# EAGLE board Multimeter - Ultimate (EAGLE 6.1)
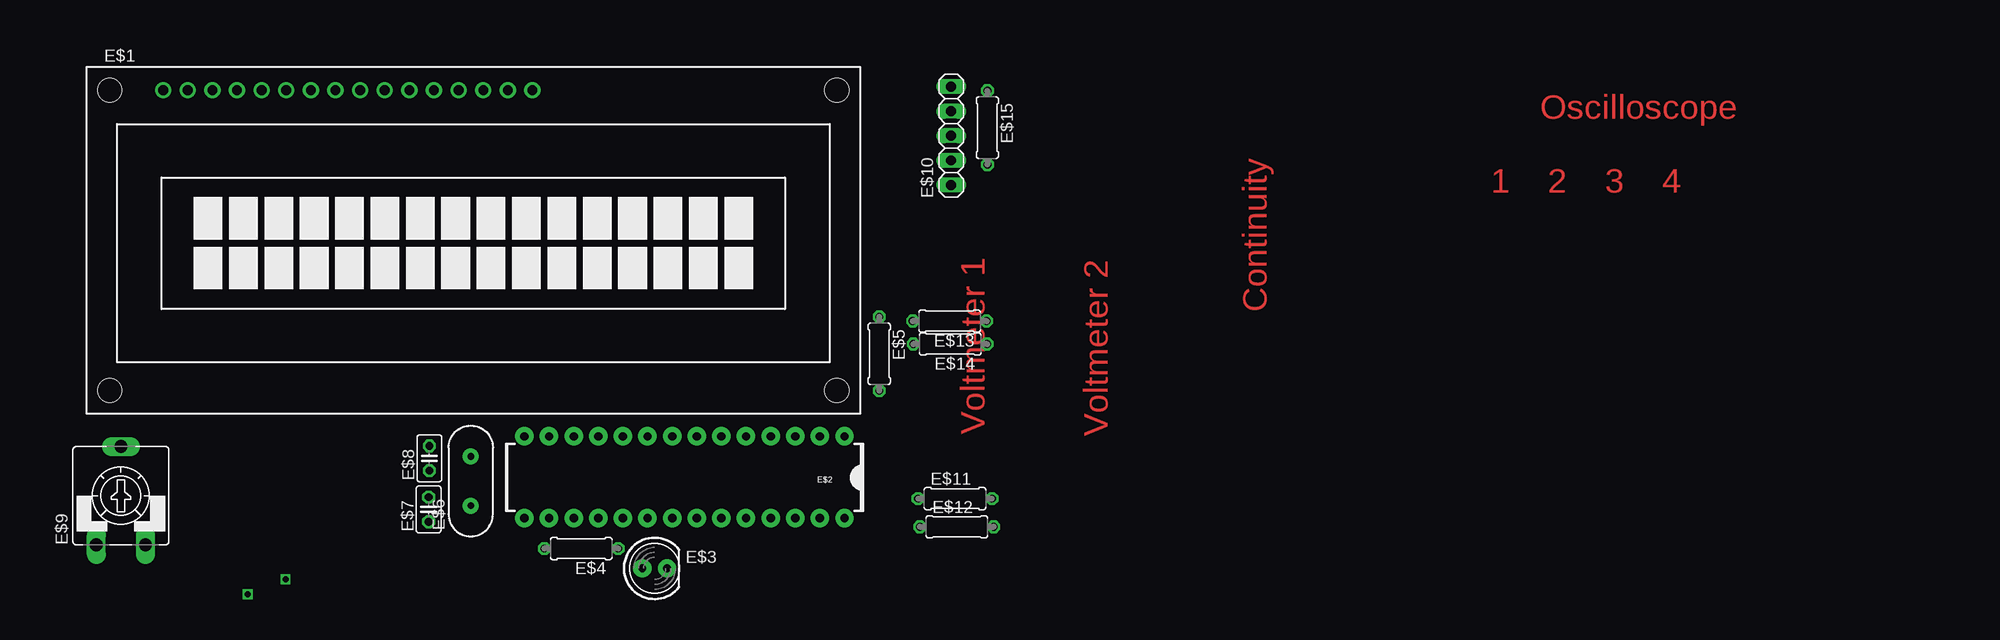
[diagram p0: board, top side]
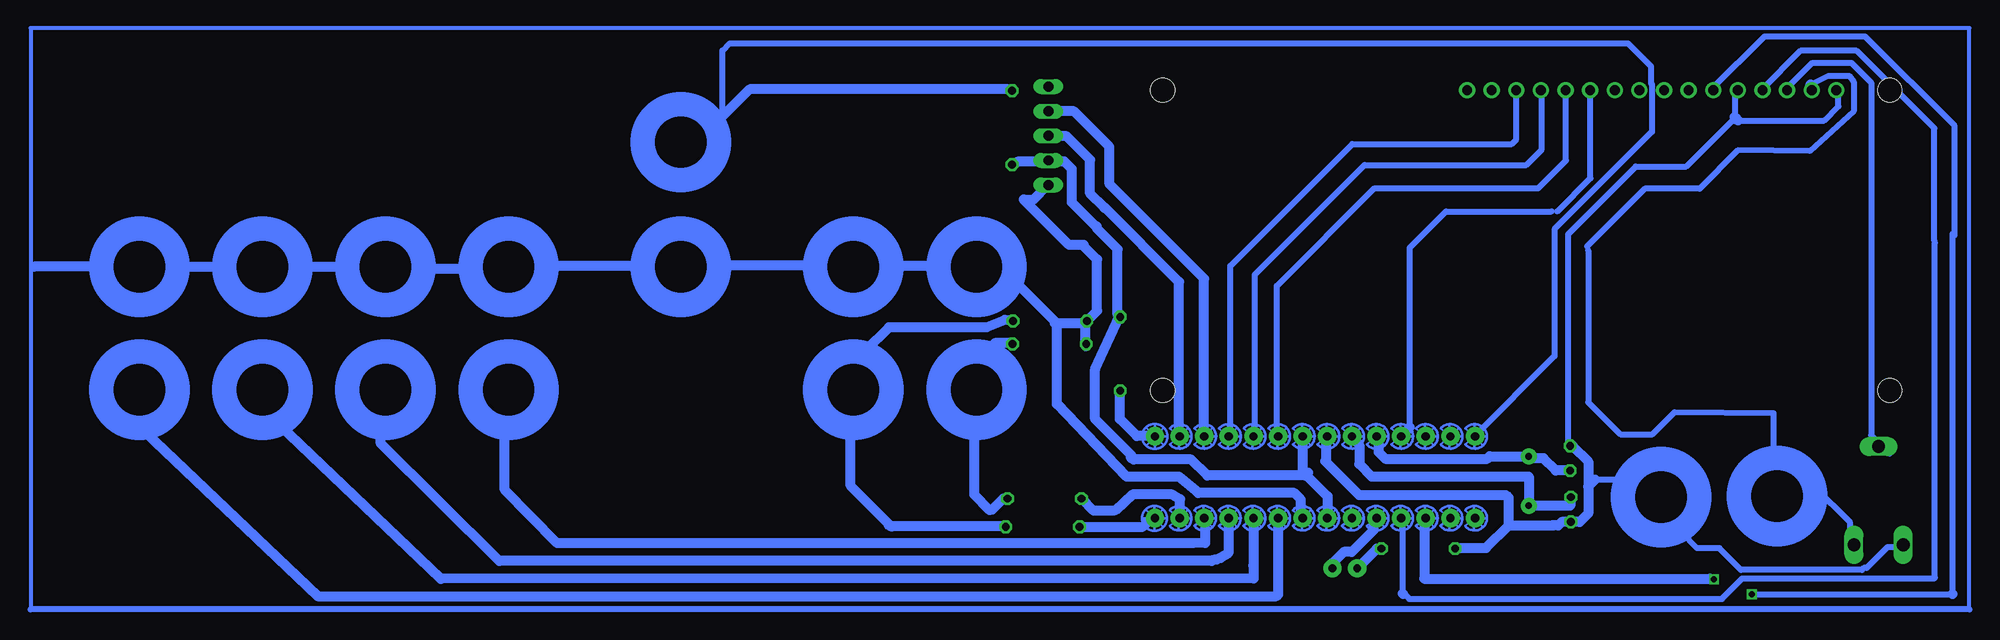
[diagram p1: board, bottom side, seen from below]

No outline drawn. Coordinates in mm, seen from the top.
Copper layers (1*16): Top 0.035mm / dielectric 1.5mm / Bottom 0.035mm
Design rules: minimum track width 10mil, minimum drill 24mil, track to track 8mil, track to pad 8mil, pad to pad 8mil, via to via 8mil, smd to smd 8mil, copper to edge 40mil, drill to drill 8mil, minimum pad ring 10mil, minimum via ring 8mil, stop-mask expansion 4mil, vias tented up to drill 0mil, thermal gap 10mil

## Footprints (pad centres in the part's own frame; a part is rotated, then mirrored left to right if it is on the bottom)
TUXGR_16X2_R2 = drill 1 pad 1.676: 1 -32,15.5; 2 -29.46,15.5; 3 -26.92,15.5; 4 -24.38,15.5; 5 -21.84,15.5; 6 -19.3,15.5; 7 -16.76,15.5; 8 -14.22,15.5; 9 -11.68,15.5; 10 -9.14,15.5; 11 -6.6,15.5; 12 -4.06,15.5; 13 -1.52,15.5; 14 1.02,15.5; 15 3.56,15.5; 16 6.1,15.5 | hole 2.5: -37.5,-15.5; 37.5,-15.5; -37.5,15.5; 37.5,15.5
DIL28-3-SIMON-KIT = drill 0.864 pad 1.905: 1 -16.51,-4.255; 2 -13.97,-4.255; 3 -11.43,-4.255; 4 -8.89,-4.255; 5 -6.35,-4.255; 6 -3.81,-4.255; 7 -1.27,-4.255; 8 1.27,-4.255; 9 3.81,-4.255; 10 6.35,-4.255; 11 8.89,-4.255; 12 11.43,-4.255; 13 13.97,-4.255; 14 16.51,-4.255; 15 16.51,4.191; 16 13.97,4.191; 17 11.43,4.191; 18 8.89,4.191; 19 6.35,4.191; 20 3.81,4.191; 21 1.27,4.191; 22 -1.27,4.191; 23 -3.81,4.191; 24 -6.35,4.191; 25 -8.89,4.191; 26 -11.43,4.191; 27 -13.97,4.191; 28 -16.51,4.191
LED5MM-KIT = drill 0.813 pad 1.88: A -1.27,0; K 1.27,0
0207/7 = drill 0.813 octagon: 1 -3.81,0; 2 3.81,0
HC49US = drill 0.7 pad 1.651: 1 -2.54,0; 2 2.54,0
C025-025X050 = drill 0.813 octagon: 1 -1.27,0; 2 1.27,0
CA9V = drill 1.321 long: A -2.54,-5.08; E 2.54,-5.08; S 0,5.08
1X05 = drill 1.016 long: 1 -5.08,0; 2 -2.54,0; 3 0,0; 4 2.54,0; 5 5.08,0

## Placement (x,y rotation side)
E$1  [TUXGR_16X2_R2]  45.72,38.1 0 top
E$2  [DIL28-3-SIMON-KIT]  67.5,13.61 180 top
E$3  [LED5MM-KIT]  64.43,4.25 0 top
E$4  [0207/7]  56.85,6.29 180 top
E$5  [0207/7]  87.59,26.39 270 top
E$6  [HC49US]  45.45,13.26 90 top
E$7  [C025-025X050]  41.1,10.33 90 top
E$8  [C025-025X050]  41.18,15.6 90 top
E$9  [CA9V]  9.36,11.75 0 top
E$10  [1X05]  95.01,48.89 90 top
E$11  [0207/7]  95.41,11.45 0 top
E$12  [0207/7]  95.59,8.53 0 top
E$13  [0207/7]  94.85,29.77 180 top
E$14  [0207/7]  94.91,27.4 180 top
E$15  [0207/7]  98.74,49.73 270 top

## Library data of the parts
E$1 = display-lcd
E$2 = SparkFun-DigitalIC
E$3 = SparkFun-LED
E$4 E$5 E$7 E$8 E$11-E$15 = rcl
E$6 = SparkFun-FreqCtrl
E$9 = pot
E$10 = pinhead

## Tracks (layer width: path | path; a pad name or v marks a point on that pad's centre or on a via)
S$1
  Bottom 0.406: 0,0 0,60
  Bottom 0.61: 0,0 200,0
S$2
  Bottom 0.406: 0,60 200,60 200,0
S$3
  Bottom 1.016: 101.05,10.25 102.64,11.84 102.64,17.99
S$4
  Bottom 1.016: 115.21,18.57 115.21,19.34
S$5
  Bottom 1.016: 78.85,8.35 78.85,6.86 80.07,6.84 145.67,6.84 151.08,12.35 151.08,18.53
S$6
  Bottom 1.016: 76.4,9.45 76.44,9.41 76.44,5.81 77.24,5.32 77.66,5.16 78.17,5.01 151.66,5.01 163.88,17.13 163.88,18.05
S$7
  Bottom 1.016: 73.93,9.61 73.85,9.53 73.85,4.53 73.84,3.2 157.66,3.15 174.39,19.15 175.14,19.15
S$8
  Bottom 1.016: 188.27,18.39 170.4,1.38 71.5,1.38 71.29,1.52 71.29,9.34
S$9
  Bottom 1.016: 111.17,8.53 115.4,12.76 115.4,17.73
S$10
  Bottom 0.61: 1.71,1.62 1.71,38.78
  Bottom 1.016: 1.75,1.59 1.71,1.62
S$11
  Bottom 0.61: 3.66,3.2 3.54,3.32 3.54,37.87
S$12
  Bottom 0.61: 76.24,18.08 76.24,35.47 63.65,48.05 47.2,48.05 46.75,48.51 46.75,53.43
S$13
  Bottom 0.61: 73.72,17.96 73.72,34.55 62.4,45.88 45.72,45.88 44.12,47.48 44.12,53.54
S$14
  Bottom 0.61: 71.44,17.73 71.44,33.41 61.37,43.48 44.46,43.48 41.6,46.33 41.6,53.54
S$15
  Bottom 0.61: 42.52,41.07 39.09,44.5 39.09,53.43
S$16
  Bottom 1.016: 68.85,9.48 68.96,9.59 68.96,11.35 69.62,12.01 79.54,12.01 81.55,13.71 86.94,13.71 94.14,21.21 94.14,29.54 97.99,33.4 98.38,33.4
S$17
  Bottom 1.016: 107.25,35.33 107.36,35.44 110.77,35.44
S$18
  Bottom 1.016: 119.09,35.05 119.53,35.49 128.73,35.49
S$19
  Bottom 1.016: 137.03,35.16 137.31,35.45 147.12,35.45
S$20
  Bottom 1.016: 154.55,34.97 154.74,35.16 159.78,35.16
S$21
  Bottom 1.016: 180.66,35.01 181,35.35 184.2,35.35
S$22
  Bottom 1.016: 167.51,35.35 171.97,35.35
S$23
  Bottom 1.016: 193.44,35.49 193.56,35.38 199.64,35.38
S$24
  Bottom 0.61: 57.72,18.81 57.72,37.35 53.98,41.09 43.1,41.09
  Bottom 1.016: 58.95,17.58 57.72,18.81
S$25
  Bottom 1.016: 68.78,17.85 68.8,17.83 68.8,14.27 66.21,11.69 66.21,9.42
S$26
  Bottom 1.016: 61.42,9.47 61.09,9.8
S$27
  Bottom 1.016: 61.19,9.38 61.47,9.11 61.47,8.19 63.72,5.94 64.54,5.94 65.71,4.78 65.71,4.22
S$28
  Bottom 1.016: 63.09,4.32 61.14,6.27 60.72,6.27
S$29
  Bottom 1.016: 68.22,14.13 68.53,13.82 78.61,13.82 80.27,15.48 86.22,15.48
S$30
  Bottom 1.016: 83.96,17.88 84,17.91 85.88,17.91 87.63,19.66 87.63,22.53
S$31
  Bottom 1.016: 86.47,15.61 86.47,15.94 90.17,19.65 90.17,24.8 87.66,30.23
S$32
  Bottom 1.016: 66.38,17.96 66.4,17.95 66.4,15.33
S$33
  Bottom 1.016: 61.32,17.87 60.96,17.5 60.96,16.25 60.26,15.55 49.74,15.55 49.49,15.81 45.41,15.81
S$34
  Bottom 1.016: 63.73,17.78 62.93,16.99 62.93,15.01 61.66,13.74 45.44,13.74 45.44,10.77
S$35
  Bottom 1.016: 66.44,15.3 62.97,11.82 47.83,11.82 47.54,11.54 47.54,8.86 47.38,8.7 42.86,8.7
S$36
  Bottom 1.016: 41.18,11.63 41.18,10.71 45.35,10.71
S$37
  Bottom 1.016: 41.33,14.34 42.67,14.34 43.93,15.61 45.31,15.61 45.5,15.8
S$38
  Bottom 1.016: 41.33,16.91 40.95,16.91 39.31,15.26 39.31,9.91 40.19,9.03 42.06,9.03 42.4,8.68 42.94,8.68 42.98,8.72
S$39
  Bottom 1.016: 53.09,6.35 49.85,6.35 47.47,8.73
S$40
  Bottom 0.61: 24.2,53.52 24.2,50.82 | 23.86,50.48 14.97,50.48 13.51,51.94 13.51,53.41 13.73,53.63
  Bottom 1.016: 24.2,50.82 23.86,50.48
S$41
  Bottom 0.61: 41.37,16.97 41.37,38.75 34.41,45.71 29.2,45.71 24.05,50.86
S$42
  Bottom 0.61: 16.39,54.17 14.53,55.09 12.41,55.09 11.94,54.47 11.94,51.42 16.48,47.33 23.87,47.39 27.82,43.44 33.48,43.44 39.45,37.46
  Bottom 1.016: 16.39,53.66 16.39,54.17
S$43
  Bottom 0.61: 3.62,38.03 3.62,49.68 11.61,57.67 17.41,57.67 21.42,53.67
S$44
  Bottom 0.61: 1.52,38.61 1.52,49.92 10.74,59.13 21.14,59.13 26.6,53.68
S$45
  Bottom 1.016: 56.46,9.15 56.23,8.92 56.23,3.2
S$46
  Bottom 0.61: 58.46,8.98 58.46,1.67
  Bottom 1.016: 58.68,9.2 58.46,8.98 | 58.46,1.67 58.38,1.59
S$47
  Bottom 0.61: 3.77,3.17 23.47,3.17 24.92,1.72
S$48
  Bottom 0.61: 58.52,1.56 58.24,1.56 57.78,1.1 25.52,1.1 24.74,1.88
S$49
  Bottom 1.016: 56.27,3.17 26.76,3.17 26.71,3.12
S$50
  Bottom 0.61: 1.65,1.51 22.49,1.51
S$51
  Bottom 0.61: 34.83,13.39 38.62,13.39
  Bottom 1.016: 38.62,13.39 39.31,12.7
S$52
  Bottom 0.61: 39.31,37.07 39.31,21.39 36,18.08 32.69,18.08 30.4,20.36 20.21,20.29 20.2,15.04
S$53
  Bottom 1.016: 78.94,17.66 78.94,34.14 88.66,43.86
S$54
  Bottom 1.016: 81.52,17.93 81.52,33.81 89.18,41.48
S$55
  Bottom 1.016: 87.86,30.43 87.86,37.18 89.98,39.29
S$56
  Bottom 1.016: 94.34,29.57 91.23,29.57 89.98,30.83 89.98,36.12 91.36,37.51
S$57
  Bottom 0.61: 18.73,53.79 18.73,53.9 16.19,56.43 12.17,56.43 10.13,54.39 10.13,17.97 8.23,16.06
S$58
  Bottom 0.61: 12.3,7.07 12.3,8.98 16.02,12.71
S$59
  Bottom 0.61: 6.74,6.43 8.44,6.43 10.59,4.28 10.88,4.28 11.07,4.09 23.55,4.09 25.78,6.32 28.09,6.32 29.66,7.89
S$60  (via drill 0.6)
  other vias: 22.44,1.56
S$61  (via drill 0.6)
  other vias: 26.34,3.12
S$62
  Bottom 0.61: 128.63,48.23 128.63,57.67 127.87,58.44 35.21,58.44 32.84,56.07 32.84,54.31 32.74,54.2 32.74,49.32 42.8,39.25 42.8,26.14 51.12,17.82
S$63
  Bottom 1.016: 91.38,37.64 92.88,37.64 97.56,42.32 96.53,42.32 95.03,43.83
S$64
  Bottom 1.016: 90.03,39.55 90.1,39.55 92.57,42.01 92.57,45.45 93.35,46.24 94.91,46.24 94.96,46.28
S$65
  Bottom 1.016: 89.13,41.46 89.22,41.46 90.69,42.93 90.69,46.42 93.12,48.85 94.86,48.85 94.91,48.81
S$66
  Bottom 1.016: 88.72,44.03 88.72,47.75 92.39,51.42 94.91,51.42
S$67
  Bottom 1.016: 91.16,27.16 91.16,29.48 91.05,29.59
S$68
  Bottom 1.016: 98.59,29.81 99.5,29.89 101.36,29.13 111.46,29.13 113.85,26.74
S$69
  Bottom 1.016: 98.94,27.5 100.53,27.5 101.71,26.32
S$70
  Bottom 1.016: 88.1,10.25 86.33,11.87 82.23,11.87 81.42,11.38 81.42,9.72 81.49,9.66
S$71
  Bottom 1.016: 88.24,10.2 90.33,10.2 91.55,11.41
S$72
  Bottom 1.016: 99.2,11.46 99.64,11.46 100.8,10.31
S$73
  Bottom 1.016: 84.33,9.46 85.26,8.53
S$74
  Bottom 1.016: 85.38,8.49 91.93,8.49 91.99,8.54
S$75
  Bottom 1.016: 99.42,8.6 111.32,8.6 111.54,8.82
S$76
  Bottom 1.016: 94.95,46.22 98.21,46.22 98.6,45.82
S$77
  Bottom 1.016: 99.16,53.68 125.81,53.68 129,50.48
(copper drawn outside any net)
  shapes: Bottom circle x16

## Text on the board
Top: Oscilloscope | 1 2 3 4 | Continuity | Voltmeter 1 | Voltmeter 2